# EAGLE board ISC_Arduino_Motor_v1.1 (EAGLE 7.7.0)
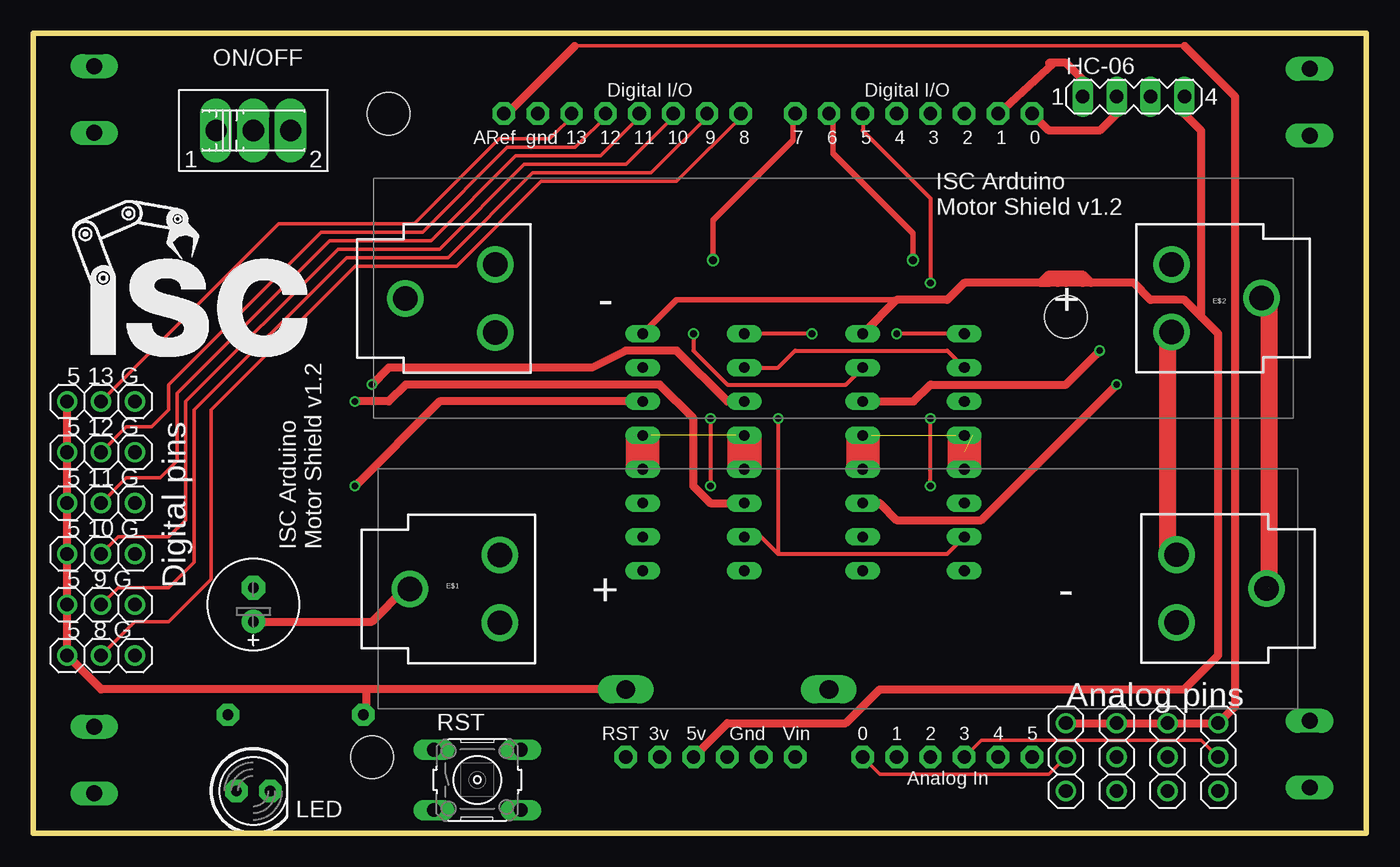
[diagram p0: board, top side]
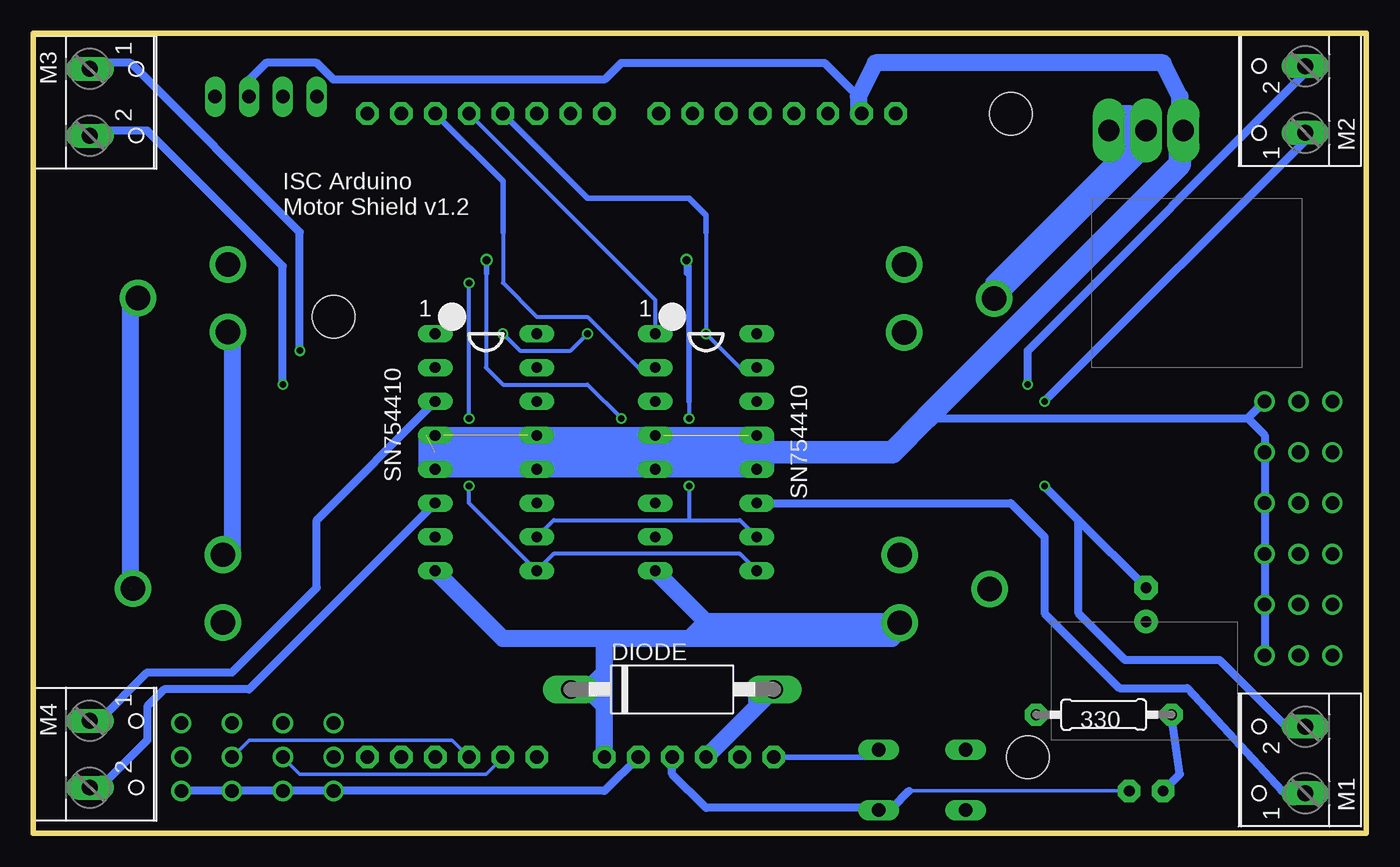
[diagram p1: board, bottom side, seen from below]

Size 100 x 60 mm. Coordinates in mm from the lower left corner, seen from the top.
Outline: 0,60 0,0 100,0 100,60 0,60
Copper layers (1*16): Top 0.035mm / dielectric 1.5mm / Bottom 0.035mm
Design rules "ITEADstudioDRC": minimum track width 6mil, minimum drill 12mil, track to track 6mil, track to pad 6mil, pad to pad 6mil, via to via 6mil, smd to smd 0mil, copper to edge 10mil, drill to drill 10mil, minimum pad ring 10mil, minimum via ring 6mil, stop-mask expansion 2mil, vias tented up to drill 100mil, thermal gap 10mil

## Footprints (pad centres in the part's own frame; a part is rotated, then mirrored left to right if it is on the bottom)
0207/10 = drill 0.813 pad 1.676 octagon: 1 -5.08,0; 2 5.08,0
E2,5-7 = drill 0.813 pad 1.778: + -1.27,0 | drill 0.813 pad 1.778 octagon: - 1.27,0
CB417-15 = drill 1.397 long: A 7.62,0; C -7.62,0
BATTERY_18650-HOLDER = drill 1.829: GND@1 32.128,0.01; GND@2 25.38,2.55; GND@3 25.38,-2.53; PWR@1 -32.128,-0.01; PWR@2 -25.38,2.53; PWR@3 -25.38,-2.55
ARDUINO = drill 1 pad 1.676 octagon: 3V 35.56,2.54; 5V 38.1,2.54; A0 50.8,2.54; A1 53.34,2.54; A2 55.88,2.54; A3 58.42,2.54; A4 60.96,2.54; A5 63.5,2.54; AREF 23.876,50.8; D0 63.5,50.8; D1 60.96,50.8; D2 58.42,50.8; D3 55.88,50.8; D4 53.34,50.8; D5 50.8,50.8; D6 48.26,50.8; D7 45.72,50.8; D8 41.656,50.8; D9 39.116,50.8; D10 36.576,50.8; D11 34.036,50.8; D12 31.496,50.8; D13 28.956,50.8; GND 26.416,50.8; GND1 43.18,2.54; GND2 40.64,2.54; RESET 33.02,2.54; VIN 45.72,2.54 | hole 3.2: 15.24,50.8; 66.04,35.56; 13.97,2.54
DIP16 = drill 0.8 long: P1 -8.89,-3.81; P2 -6.35,-3.81; P3 -3.81,-3.81; P4 -1.27,-3.81; P5 1.27,-3.81; P6 3.81,-3.81; P7 6.35,-3.81; P8 8.89,-3.81; P9 8.89,3.81; P10 6.35,3.81; P11 3.81,3.81; P12 1.27,3.81; P13 -1.27,3.81; P14 -3.81,3.81; P15 -6.35,3.81; P16 -8.89,3.81
1X03 = drill 1.016: 1 -2.54,0; 2 0,0; 3 2.54,0
MA04-1 = drill 1.016 long: 1 -3.81,0; 2 -1.27,0; 3 1.27,0; 4 3.81,0
LED5MM = drill 0.813 pad 1.676 octagon: A -1.27,0; K 1.27,0
W237-102 = drill 1.194 long: 1 -2.5,-1.27; 2 2.5,-1.27
SLIDE_SWITCH = drill 1.6 long: 1 -2.794,0; 2 0,0; 3 2.794,0
BUTTON = drill 1.016 long: 1 -3.251,2.261; 2 3.251,2.261; 3 -3.251,-2.261; 4 3.251,-2.261

## Placement (x,y rotation side)
330  [0207/10]  19.68,8.89 0 bottom
CAP  100uF  [E2,5-7]  16.51,17.15 90 top
DIODE  [CB417-15]  52.07,10.8 0 bottom
E$1  [BATTERY_18650-HOLDER]  60.38,18.35 0 top
E$2  [BATTERY_18650-HOLDER]  60.03,40.13 180 top
E$4  [ARDUINO]  11.43,3.18 0 top
E$7  [DIP16]  66.04,28.58 90 top
E$8  [DIP16]  49.53,28.58 90 bottom
E$9  [1X03]  88.9,5.72 90 top
E$11  [1X03]  85.09,5.72 90 top
E$12  [1X03]  81.28,5.72 90 top
E$13  [1X03]  77.47,5.72 90 top
E$16  [1X03]  5.08,32.39 0 top
E$33  [1X03]  5.08,28.58 0 top
E$34  [1X03]  5.08,24.77 0 top
E$35  [1X03]  5.08,20.96 0 top
E$36  [1X03]  5.08,17.15 0 top
E$37  [1X03]  5.08,13.34 0 top
HC-06  Rx Tx G Vcc  [MA04-1]  82.55,55.25 0 top
LED  [LED5MM]  16.51,3.18 0 top
M1  [W237-102]  5.84,5.5 90 bottom
M2  [W237-102]  5.84,55.03 90 bottom
M3  [W237-102]  94.49,54.83 270 bottom
M4  [W237-102]  94.49,5.93 270 bottom
ON/OFF  [SLIDE_SWITCH]  16.51,52.71 0 top
RST  [BUTTON]  33.31,4.01 0 top

## Library data of the parts
330 CAP DIODE E$4 E$9 E$11-E$13 E$16 E$33-E$37 LED = adafruit
E$1 E$2 E$7 E$8 ON/OFF RST = ISCTRainingProgram
HC-06 = con-lstb
M1-M4 = con-wago-500

## Nets
9V: E$4.VIN E$7.P1 E$8.P16
D1: E$4.D2 E$7.P7 E$8.P10
D2: E$7.P15 E$8.P2
D3: E$4.D4 E$7.P10 E$8.P7
D4: E$7.P2 E$8.P15
GND: E$7.P12 E$8.P5 E$16.3 E$37.3
S1: E$4.D3 E$7.P8 E$8.P9
S2: E$4.D5 E$7.P16 E$8.P1
S$1: E$4.A3 E$9.2
S$3: E$4.GND2 LED.K
S$4: E$4.RESET
S$7: E$4.A2 E$11.2
S$10: CAP.- E$8.P6
S$11: E$4.A1 E$12.2
S$13: ON/OFF.2
S$16: E$4.A0 E$13.2
S$17: E$4.GND1 E$9.1
S$18: E$8.P11
S$21: E$8.P3
S$23: E$7.P6
S$27: E$7.P3
S$28: E$37.2
S$30: E$4.D0
S$34: E$4.D1
S$35: 330.2 LED.A
S$36: E$7.P11
S$38: E$7.P14
S$39: E$13.3
S$42: E$36.2
S$44: E$35.2
S$45: E$34.2
S$46: E$33.2
S$47: E$16.2
S$52: E$8.P14
S$54: DIODE.A E$4.5V E$7.P9 E$8.P8 E$16.1 E$37.1 HC-06.4

## Tracks (layer width: path | path; a pad name or v marks a point on that pad's centre or on a via)
9V
  Bottom 0.813: 57.15,9.53 57.15,10.8 57.15,12.07
  Bottom 1.27: 49.53,15.88 35.56,15.88 35.56,14.61 49.53,14.61 | 49.53,15.88 E$8.P16 | 49.53,14.61 50.8,14.61 | 50.8,14.61 57.15,14.61 | 57.15,14.61 64.77,14.61 E$7.P1 | 49.53,14.61 49.53,15.88 | 49.53,15.88 50.8,14.61 | 57.15,10.8 58.42,10.8 | E$4.VIN 57.15,9.53 | 57.15,9.53 57.15,12.07 | 57.15,12.07 57.15,14.61 | 57.15,12.07 58.42,10.8 | 58.42,10.8 57.15,9.53
D1
  Top 0.305: E$8.P10 55.88,34.93 57.15,36.2 68.58,36.2 E$7.P7
  Bottom 0.305: 64.77,45.09 64.77,41.28 62.23,38.74 58.42,38.74 54.61,34.93 E$8.P10
  Bottom 0.406: E$4.D2 64.77,48.9 64.77,45.09
D2  (via drill 0.5)
  Top 0.305: v50.8,31.12 v50.8,26.04
  Bottom 0.305: 50.8,32.39 v50.8,31.12 | E$7.P15 60.96,23.5 50.8,23.5 | 50.8,23.5 46.99,23.5 E$8.P2 | v50.8,26.04 50.8,23.5
  Bottom 0.406: 50.8,42.55 50.8,32.39
D3  (via drill 0.5)
  Top 0.305: v49.53,37.47 49.53,36.2 52.07,33.66 60.96,33.66 E$7.P10
  Bottom 0.305: 49.53,45.09 v49.53,37.47 46.99,34.93 E$8.P7
  Bottom 0.406: 49.53,45.09 49.53,46.36 50.8,47.63 58.42,47.63 E$4.D4
D4  (via drill 0.5)
  Top 0.305: v55.88,31.12 55.88,20.96 | 55.88,20.96 54.61,22.23 E$8.P15 | 55.88,20.96 68.58,20.96 E$7.P2
  Bottom 0.305: 66.04,42.55 66.04,34.93 64.77,33.66 58.42,33.66 v55.88,31.12
GND  (5 unrouted)
  Top 1.27: 45.09,29.85 45.09,27.31 45.72,27.31 | 45.72,27.31 46.35,27.31 46.35,29.85 E$8.P5 45.72,27.31 | 53.34,29.85 53.98,29.85 53.98,27.31 53.34,27.31 | 53.34,27.31 52.7,27.31 52.7,29.85 53.34,29.85 | 53.34,29.85 53.34,27.31 | 61.59,29.85 61.59,27.31 62.23,27.31 | 62.23,27.31 62.87,27.31 62.87,29.85 E$7.P12 62.23,27.31 | 69.22,27.31 70.48,27.31 70.48,29.85 69.22,29.85 69.22,27.31
  Bottom 0.61: 33.02,31.12 8.89,31.12 | 8.89,31.12 E$16.3 | 8.89,31.12 7.62,29.85 E$37.3
  Bottom 1.27: 69.22,27.31 70.48,27.31 70.48,29.85 45.09,29.85 45.09,27.31 69.22,27.31 | 69.22,27.31 69.22,29.85
  Bottom 1.676: 13.97,51.44 13.97,50.17 33.02,31.12 35.56,28.58 69.85,28.58
S1  (via drill 0.5)
  Top 0.305: E$7.P8 v64.77,37.47 | v58.42,37.47 E$8.P9
  Bottom 0.305: E$4.D3 53.34,40.01 E$8.P9 | v64.77,37.47 63.5,36.2 59.69,36.2 v58.42,37.47
S2  (via drill 0.5)
  Top 0.305: E$4.D5 62.23,52.71 67.31,47.63 v67.31,41.28 | v67.31,26.04 v67.31,31.12
  Bottom 0.305: E$8.P1 46.99,20.96 60.96,20.96 E$7.P16 67.31,24.77 v67.31,26.04 | v67.31,31.12 v67.31,41.28
S$1
  Top 0.254: E$4.A3 71.12,6.99 87.63,6.99 E$9.2
S$2  (1 unrouted)
  Top 1.27: 92.71,40.01 92.71,18.42
  Bottom 1.27: 92.71,18.42 92.71,40.01
S$3
  Bottom 0.254: 34.29,3.18 LED.K
  Bottom 0.61: 34.29,3.18 35.56,1.91 49.53,1.91 52.07,4.45 E$4.GND2
S$4
  Bottom 0.406: E$4.RESET 37.47,5.72 36.83,6.36
S$5  (via drill 0.6)
  Top 0.406: v51,43 51,46 57,52 57,54
  Bottom 0.406: 51,42 v51,43
S$6
  Bottom 1.27: 85.09,37.47 85.09,20.96
S$7
  Bottom 0.254: E$11.2 83.82,6.99 68.58,6.99 E$4.A2
S$8  (via drill 0.6)
  Top 0.406: v66,43 66,45 60,51 60,54
  Bottom 0.406: 66,42 v66,43
S$9
  Bottom 0.61: 38.1,55.25 40.64,57.79 55.88,57.79 57.15,56.52 77.47,56.52 78.74,57.79 82.55,57.79 83.82,56.52
  Bottom 1.27: 13.97,52.71 13.97,55.25 15.24,57.79 36.83,57.79 38.1,55.25 38.1,53.98
S$10  (via drill 0.5)
  Top 0.61: E$8.P6 30.48,32.39 v24.13,26.04
  Bottom 0.61: 5,8 6,8 11,13 18.07,13 21.59,16.52 21.59,23.5 | 21.59,23.5 v24.13,26.04 | CAP.- 21.59,23.5
S$11
  Bottom 0.254: E$12.2 80.01,4.45 66.04,4.45 E$4.A1
S$13
  Bottom 1.27: ON/OFF.2 16.51,51.44 27.94,40.01 27.94,41.28 17.78,51.44 17.78,53.98 | 17.78,53.98 16.51,53.98 | 17.78,53.98 19.05,53.98
S$14
  Top 1.27: 85.09,37.47 85.09,20.96
S$16
  Top 0.254: E$13.2 76.2,4.45 63.5,4.45 E$4.A0
S$17
  Bottom 0.61: E$4.GND1 57.15,3.18 E$9.1
S$18  (via drill 0.5)
  Top 0.61: E$8.P11 52.07,32.39 48.26,36.2 44.45,36.2 41.91,34.93 26.67,34.93 v25.4,33.66
  Bottom 0.61: v25.4,33.66 25.4,36.2 3.81,57.79
S$21
  Bottom 0.61: E$8.P3 26.67,24.77 24.13,22.23 24.13,16.52 18.51,10.89 13.43,10.89 6.35,3.18 3.81,3.18
S$23
  Bottom 0.61: 95.25,8.26 91.44,12.07 85.09,12.07 78.74,18.42 78.74,23.5 E$7.P6
S$27
  Bottom 0.61: E$7.P3 83.82,10.8 90.17,10.8 91.44,9.53 91.44,6.99 95.25,3.18
S$28
  Top 0.254: 53.34,53.98 48.26,48.9 38.1,48.9 31.75,42.55 24.13,42.55 13.34,31.75 13.34,19.05 10.16,15.88 7.62,15.88 E$37.2
S$30
  Top 0.61: 81.28,53.98 80.01,52.71 76.2,52.71 E$4.D0
S$31
  Top 0.61: 78.74,56.52 77.47,57.79 76.2,57.79
S$34
  Top 0.61: E$4.D1 76.58,57.79
S$35
  Bottom 0.61: LED.A 13.97,4.45 330.2
S$36  (via drill 0.5)
  Top 0.61: E$7.P11 66.04,32.39 67.31,33.66 77.47,33.66 v80.01,36.2
  Bottom 0.61: v80.01,36.2 80.01,45.09 92.71,57.79 95.25,57.79
S$38  (via drill 0.5)
  Top 0.61: E$7.P14 63.5,24.77 64.77,23.5 71.12,23.5 v81.28,33.66
  Bottom 0.61: v81.28,33.66 81.28,42.55 91.44,52.71 95.25,52.71
S$39
  Top 0.254: 86.36,59.06 40.64,59.06
  Top 0.61: E$13.3 88.9,8.26 90.17,9.53 90.17,55.25 86.36,59.06 | 40.64,59.06 35.56,53.98
S$40
  Top 0.61: 16.32,15.88 25.4,15.88 27.94,18.42
S$42
  Top 0.254: E$36.2 6.35,18.42 10.16,18.42 12.06,20.32 12.06,31.75 23.5,43.19 31.11,43.19 37.47,49.53 46.35,49.53 50.8,53.98
S$44
  Top 0.254: E$35.2 6.35,22.23 10.16,22.23 11.43,23.5 11.43,32.39 22.86,43.82 30.48,43.82 36.83,50.17 44.45,50.17 48.26,53.98
S$45
  Top 0.254: 45.72,53.98 42.55,50.8 36.2,50.8 29.84,44.45 22.23,44.45 10.79,33.02 10.79,27.95 9.53,26.68 6.99,26.68 E$34.2
S$46
  Top 0.254: E$33.2 6.99,30.48 8.89,30.48 10.16,31.75 10.16,33.66 21.59,45.09 29.21,45.09 35.56,51.44 40.64,51.44 43.18,53.98
S$47
  Top 0.254: 40.64,53.98 38.73,52.08 34.92,52.08 28.57,45.73 18.41,45.73 E$16.2
S$52
  Top 0.61: E$8.P14 50.8,24.77 49.53,26.04 49.53,31.12 46.99,33.66 27.94,33.66 26.67,32.39 24.13,32.39
S$53  (via drill 0.5)
  Bottom 0.61: v24.13,32.39 3.81,52.71
S$54
  Top 0.406: 64.77,40.01 48.26,40.01 E$8.P8
  Top 0.61: 76.2,41.91 76.83,41.91 | 76.83,41.91 78.11,41.91 | 78.11,41.91 78.74,41.91 79.38,41.28 | E$4.5V 52.07,8.26 60.96,8.26 63.5,10.8 86.36,10.8 88.9,13.34 88.9,37.47 87.63,38.74 | 87.63,38.74 86.36,40.01 83.82,40.01 82.55,41.28 79.38,41.28 | E$7.P9 64.77,40.01 68.58,40.01 69.85,41.28 75.56,41.28 | 87.63,38.74 87.63,52.71 86.36,53.98 HC-06.4 | DIODE.A 24.77,10.8 | 24.77,10.8 5.08,10.8 E$37.1 E$16.1 | 76.83,41.28 76.2,41.28 | 79.38,41.28 78.74,41.28 | 78.74,41.28 77.47,41.28 | 77.47,41.28 76.83,41.28 | 76.83,41.28 76.2,41.91 | 76.2,41.91 75.56,41.28 | 75.56,41.28 76.2,41.28 | 76.2,41.28 76.83,41.91 | 76.83,41.91 77.47,41.28 | 77.47,41.28 78.11,41.91 | 78.11,41.91 78.74,41.28 | 25,9 25,10.56 24.77,10.8
  Bottom 1.27: 45.72,9.53 DIODE.A 45.72,10.8 45.72,9.53 | E$4.5V 45.72,9.53

## Text on the board
tNames: ISC Arduino / Motor Shield v1.2 | 5 13 G | 5 12 G | 5 11 G | 5 10 G | ISC Arduino / Motor Shield v1.2 | 5 9 G | Digital pins | 5 8 G | Analog pins
bNames: ISC Arduino / Motor Shield v1.2 | 1 | 1 | SN754410 | SN754410